# Altium PCB LoRaGW_MiniPCIe.PcbDoc (part 2 of 3)
Units mm, origin at the board's own origin, x right, y up, seen from the top; angles counter-clockwise.
Board outline 30.02 x 79.66 mm, 4 copper layers (Top Layer, GND, PWR, Bottom Layer), stack 1.586 mm thick; 138 components, 116 nets, 568 pads, 433 vias.
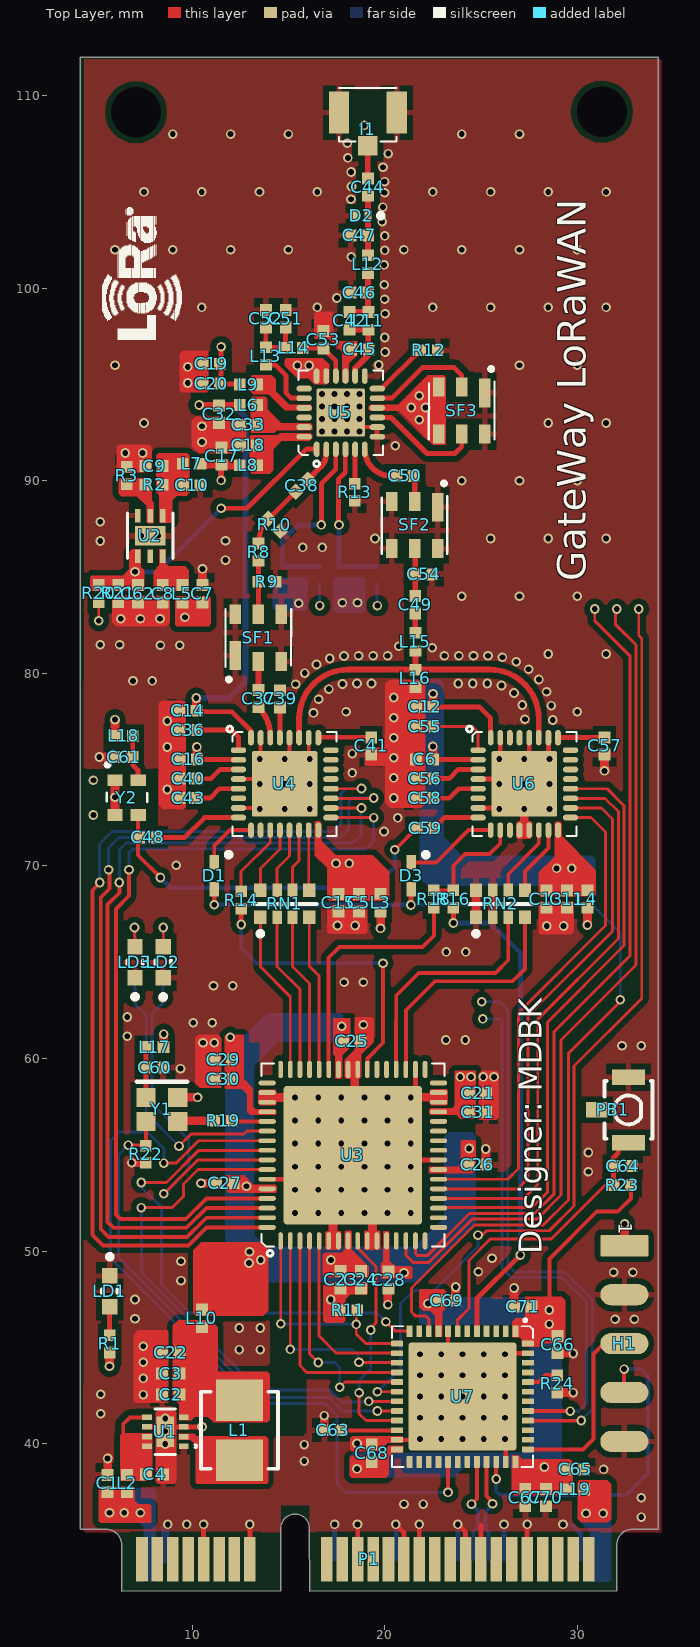
[diagram p0: Top Layer view]

## Via types
v1: diameter 0.5, hole 0.3, Top Layer to Bottom Layer, tented both sides, 433 vias

## Nets (pads, with @x,y where several pads share a name; then routed paths per layer and width w, separated by ;. In a path a pad name is that pad's centre, name@x,y a point inside that pad or via, vN(x,y) a via of type N, cw(c..) or ccw(c..) an arc to the next point about the centre after c; other vN are vias at no path point) (continued)
GND: C1.1 C2.1 C3.1 C4.1 C5.1 C6.1 C7.1 C8.1 C9.1 C10.1 C11.1 C12.1 C13.1 C14.1 C15.1 C16.1 C17.1 C18.1 C19.1 C20.1 C21.1 C22.1 C23.1 C24.1 C25.1 C26.1 C27.1 C28.1 C29.1 C30.1 C31.1 C32.1 C33.1 C34.1 C35.1 C36.1 C39.2 C40.1 C41.1 C43.1 C45.1 C46.1 C47.1 C51.1 C52.1 C53.1 C54.1 C55.1 C56.1 C57.1 C58.1 C60.1 C61.1 C62.1 C63.1 C64.1 C65.1 C66.1 C67.1 C68.1 C69.1 C70.1 C71.1 D2.2 H1.2 H1.5 I1.2 L16.1 LD1.1 LD2.1 LD3.1 P1.4 P1.9 P1.15 P1.18 P1.21 P1.26 P1.27 P1.29 P1.34 P1.35 P1.37 P1.40 P1.43 P1.50 PB1.1 R3.1 R5.1 R7.1 R9.1 R10.1 R11.2 R12.2 R13.1 R21.1 R22.1 R24.1 RN2.1 RN2.2 RN2.7 RN2.8 SF1.1 SF1.3 SF1.4 SF1.6 SF2.1 SF2.3 SF2.4 SF2.6 SF3.1 SF3.3 SF3.4 SF3.6 U1.1 U1.3 U1.6 U1.9 U2.3 U2.7 U3.6 U3.7 U3.10 U3.11 U3.24 U3.30 U3.31 U3.34 U3.40 U3.41 U3.50 U3.51 U3.59 U3.65 U4.4 U4.7 U4.26 U4.28 U4.31 U4.33 U5.7 U5.8 U5.10 U5.13 U5.15 U5.17 U5.18 U5.25 U6.4 U6.7 U6.12 U6.13 U6.26 U6.28 U6.31 U6.33 U7.8 U7.23 U7.35 U7.47 U7.49 Y1.2 Y2.1 Y2.2 | length 134.8
  Top Layer w0.203: C60.1@8.454,59.523 C60.1@8.573,59.404 ; C29.1@10.957,60.152 C29.1@11.165,59.944 C30.1@11.165,58.928 ; C17.1@11.532,91.73 C17.1@11.637,91.836 ; U4.7@12.409,73.006 13.559,73.006 v1(14.809,74.256) ; U4.4@12.409,74.506 U4.33@14.559,74.506 ; C18.1@12.479,91.836 C33.1@12.479,92.895 ; U4.31@13.559,76.656 13.559,75.506 U4.33@14.559,74.506 ; U3.51@13.9,57.728 U3.50@13.9,58.228 ; U4.28@15.059,76.656 U4.33@15.059,74.506 ; U4.26@16.059,76.656 16.059,75.506 U4.33@15.059,74.506 ; U3.65@17.1,53.728 U3.65@17.314,53.942 ; U5.15@17.958,95.443 17.958,96.531 C45.1@18.251,96.825 C45.1@18.099,96.977 ; U5.25@17.992,92.792 U5.8@19.352,92.792 ; U3.41@18.1,59.428 U3.40@18.6,59.428 ; U7.23@20.643,40.193 21.793,40.193 v1(21.843,40.243) v1(22.943,41.343) v1(24.043,42.443) 23.293,43.193 U7.8@23.293,45.843 ; U3.65@21.361,57.988 U3.65@21.6,58.228 ; U4.33@14.559,74.506 v1(14.809,74.256) ; v1(14.809,74.256) U4.33@15.059,74.506
  Top Layer w0.25: U1.6@7.661,40.865 8.361,40.865 U1.9@8.611,40.615 8.861,40.865 U1.3@9.561,40.865 v1(10.516,40.865) ; P1.9@10.6,33.992 v1(10.6,35.804) v1@10.6,35.916 ; P1.15@13,33.992 v1(13,35.804) v1@13,35.916 ; U3.59@13.9,53.728 U3.65@17.1,53.728 ; R11.2@17.622,46.887 R11.2@17.667,46.932 17.689,46.953 17.689,48.043 C23.1@17.71,48.064 C24.1@18.771,48.064 ; U3.65@18.35,54.978 18.6,54.728 U3.24@22.8,54.728 ; v1(18.593,35.804) 18.6,35.797 P1.21@18.6,33.992 ; U5.7@19.608,92.293 U5.8@19.608,92.793 ; v1(20.574,35.804) 21,35.378 P1.27@21,33.992 ; U3.65@21.6,58.228 U3.34@21.6,59.428 ; P1.29@21.8,33.992 v1@21.8,35.916 ; v1(23.793,35.804) 24.2,35.398 P1.35@24.2,33.992 ; U6.7@24.854,73.006 26.004,73.006 27.252,74.254 v1(27.254,74.256) ; U6.4@24.854,74.506 U6.33@27.004,74.506 ; P1.37@25,33.992 25,35.744 ; U6.31@26.004,76.656 26.004,75.506 U6.33@27.004,74.506 ; U7.35@26.293,39.043 26.293,40.193 v1(26.243,40.243) v1(25.143,41.343) v1(24.043,42.443) v1(25.143,43.543) v1(26.243,44.643) 26.293,44.693 U7.47@27.443,44.693 ; P1.43@27.4,33.992 v1(27.4,35.804) v1@27.4,35.854 ; U6.28@27.504,76.656 U6.33@27.504,74.506 ; U6.26@28.504,76.656 28.504,75.506 U6.33@27.504,74.506 ; U6.33@27.004,74.506 v1(27.254,74.256) ; v1(27.254,74.256) U6.33@27.504,74.506
  Top Layer w0.45: v1(5.182,75.653) C61.1@6.01,75.653 ; C1.1@5.613,38.378 v1(5.613,39.224) v1@5.664,39.275 ; Y2.2@5.999,72.642 v1(5.999,73.558) Y2.1@5.999,74.442 ; v1(6.869,54.585) 6.877,54.577 R22.1@7.602,54.577 ; Y1.2@9.252,57.978 v1(10.287,57.978) ; v1(10.465,53.518) C27.1@11.242,53.518 ; C7.1@10.541,84.575 v1(10.541,85.42) ; 14.046,57.971 15.356,57.971 v1(16.55,56.778) v1(17.75,55.578) U3.65@18.35,54.978 ; C63.1@16.857,40.693 v1(16.858,41.453) v1(16.858,41.453) ; 17.314,50.528 17.314,53.942 v1(17.75,54.378) U3.65@18.35,54.978 ; 18.44,59.309 U3.65@18.44,55.068 ; v1(18.95,54.378) 19.37,53.958 19.37,50.47 ; v1(20.168,47.219) 20.168,48.006 C28.1@20.2,48.039 ; v1(21.35,57.978) v1(20.15,56.778) U3.65@18.44,55.068 ; U3.65@21.361,57.988 22.555,57.988 ; C69.1@23.673,47.422 23.681,47.43 23.681,48.125 v1(23.688,48.133) ; RN2.1@24.746,67.327 RN2.8@24.746,68.727 ; v1(25.248,55.296) 25.266,55.278 C26.1@25.266,54.483 ; RN2.2@25.616,67.327 RN2.7@25.616,68.727 ; v1(26.721,48.082) 26.721,47.124 C71.1@26.728,47.117 ; 27.252,71.856 U6.33@27.252,74.254 ; R24.1@28.957,42.653 29.696,42.653 29.754,42.596 v1@29.794,42.596 ; C66.1@28.981,44.693 29.78,44.693 v1(29.794,44.679) ; v1(31.42,74.93) C57.1@31.42,75.775 ; U3.65@18.35,54.978 U3.65@18.44,55.068
  Bottom Layer w0.25: P1.18@17.4,33.992 v1(17.4,35.804) ; P1.26@20.6,33.992 v1@20.6,35.928 ; P1.34@23.8,33.992 v1@23.8,35.804 ; P1.40@26.2,33.992 v1(26.2,35.804) ; v1(29.261,35.804) 29.702,35.804 30.185,35.321 30.185,34.007 P1.50@30.2,33.992
  Bottom Layer w0.45: P1.4@8.6,33.992 8.6,35.653 8.738,35.791 v1(8.738,35.804)
  other v1: 9.72,35.804 21.8,35.804 33.325,36.184 21.006,36.855 22.008,36.855 33.325,37.186 31.369,38.659 15.824,39.091 15.824,39.947 8.611,39.98 18.567,40.005 22.943,40.243 24.043,40.243 25.143,40.243 8.611,40.64 8.611,41.3 21.843,41.343 24.043,41.343 26.243,41.343 5.258,41.554 21.843,42.443 22.943,42.443 25.143,42.443 26.243,42.443 5.258,42.556 7.468,42.545 29.794,42.647 7.468,43.383 21.843,43.543 22.943,43.543 24.043,43.543 26.243,43.543 7.468,44.221 21.843,44.643 22.943,44.643 24.043,44.643 25.143,44.643 12.446,44.882 13.538,44.882 7.468,45.06 12.446,45.999 13.538,45.999 31.967,46.457 32.969,46.457 7.036,46.482 7.036,47.484 17.196,47.484 9.423,48.463 31.891,48.895 32.893,48.895 24.869,48.92 9.423,49.465 25.578,49.629 15.35,51.978 16.55,51.978 17.75,51.978 18.95,51.978 20.15,51.978 21.35,51.978 15.35,53.178 16.55,53.178 17.75,53.178 18.95,53.178 20.15,53.178 21.35,53.178 30.582,54.116 15.35,54.378 16.55,54.378 20.15,54.378 21.35,54.378 30.582,55.118 15.35,55.578 16.55,55.578 18.95,55.578 20.15,55.578 21.35,55.578 15.35,56.778 17.75,56.778 18.95,56.778 21.35,56.778 15.35,57.978 16.55,57.978 17.75,57.978 18.95,57.978 20.15,57.978 25.121,59.041 25.679,59.041 9.398,59.472 32.323,60.655 33.325,60.655 10.566,60.814 11.151,60.814 23.179,60.956 24.181,60.956 6.629,61.152 18.898,61.747 10.058,61.849 11.049,61.849 6.629,62.154 11.114,63.779 12.116,63.779 17.896,63.957 18.898,63.957 23.204,65.532 24.206,65.532 28.417,66.878 29.293,66.878 17.551,66.904 18.466,66.904 9.182,70.028 19.967,71.783 20.676,72.492 4.877,72.642 13.509,72.956 14.809,72.956 16.109,72.956 25.954,72.956 27.254,72.956 28.554,72.956 20.472,73.523 8.712,73.965 13.509,74.256 16.109,74.256 25.954,74.256 28.554,74.256 4.877,74.442 20.472,74.566 18.313,74.828 13.509,75.556 14.809,75.556 16.109,75.556 25.954,75.556 27.254,75.556 28.554,75.556 20.472,75.61 18.313,75.83 8.712,76.175 20.472,76.653 8.712,77.521 28.727,77.572 27.281,77.613 20.472,77.697 16.302,77.942 18,78 30,78 28.646,78.321 27.147,78.355 16.571,78.647 20.472,78.74 26.716,78.973 28.409,79.037 17.105,79.179 26.071,79.365 15.375,79.427 17.81,79.447 18.564,79.467 19.318,79.467 23.816,79.467 24.57,79.467 25.324,79.467 6.934,79.604 7.936,79.604 28.009,79.676 15.855,80.009 27.475,80.208 16.46,80.459 26.832,80.603 17.149,80.766 26.116,80.837 17.892,80.895 18.645,80.914 19.399,80.914 20.153,80.914 23.103,80.914 23.857,80.914 24.611,80.914 25.365,80.914 28.5,81 31.5,81 22.471,81.324 20.729,81.401 8.357,81.458 9.359,81.458 5.232,81.483 6.234,81.483 6.299,82.829 7.315,82.829 8.331,82.829 15.545,83.642 17.805,83.668 18.593,83.668 24,84 27,84 30,84 11.735,85.877 15.748,86.538 16.764,86.538 5.232,86.868 11.735,86.879 19.5,87 25.5,87 28.5,87 31.5,87 7.366,87.147 8.23,87.147 5.232,87.87 24,90 27,90 30,90 6.528,91.44 7.429,91.44 20.549,91.821 10.516,92.011 16.742,92.559 17.392,92.559 18.042,92.559 18.692,92.559 10.516,92.824 7.5,93 28.5,93 31.5,93 21.793,93.167 16.742,93.209 17.392,93.209 18.042,93.209 18.692,93.209 21.387,93.802 22.123,93.802 16.742,93.859 17.392,93.859 18.042,93.859 18.692,93.859 21.793,94.417 16.742,94.509 17.392,94.509 18.042,94.509 18.692,94.509 9.779,95.072 9.779,95.91 15.469,95.986 16.078,95.986 6,96 19.691,96.007 27,96 30,96 20.022,96.685 20.002,97.438 20.022,98.674 7.5,99 10.5,99 16.5,99 22.5,99 25.5,99 28.5,99 31.5,99 19.997,99.428 17.519,99.489 19.984,100.182 19.964,101.208 18.262,101.622 20.004,101.961 6,102 9,102 12,102 15,102 21,102 24,102 27,102 30,102 20.004,102.715 19.867,103.457 19.909,104.21 18.255,104.618 19.996,104.959 7.5,105 10.5,105 13.5,105 16.5,105 22.5,105 25.5,105 28.5,105 31.5,105 18.277,105.277 19.996,105.533 18.259,106.031 19.915,106.282 18.09,106.766 20.187,106.986 18.065,107.519 9,108 12,108 15,108 24,108 27,108 18.939,108.452